# Altium PCB V_№8.PcbDoc
Units mm, origin at the board's own origin, x right, y up, seen from the top; angles counter-clockwise.
Board outline 32.25 x 27.5 mm, 2 copper layers (Top Layer, Bottom Layer); 14 components, 15 nets, 90 pads, 7 vias.
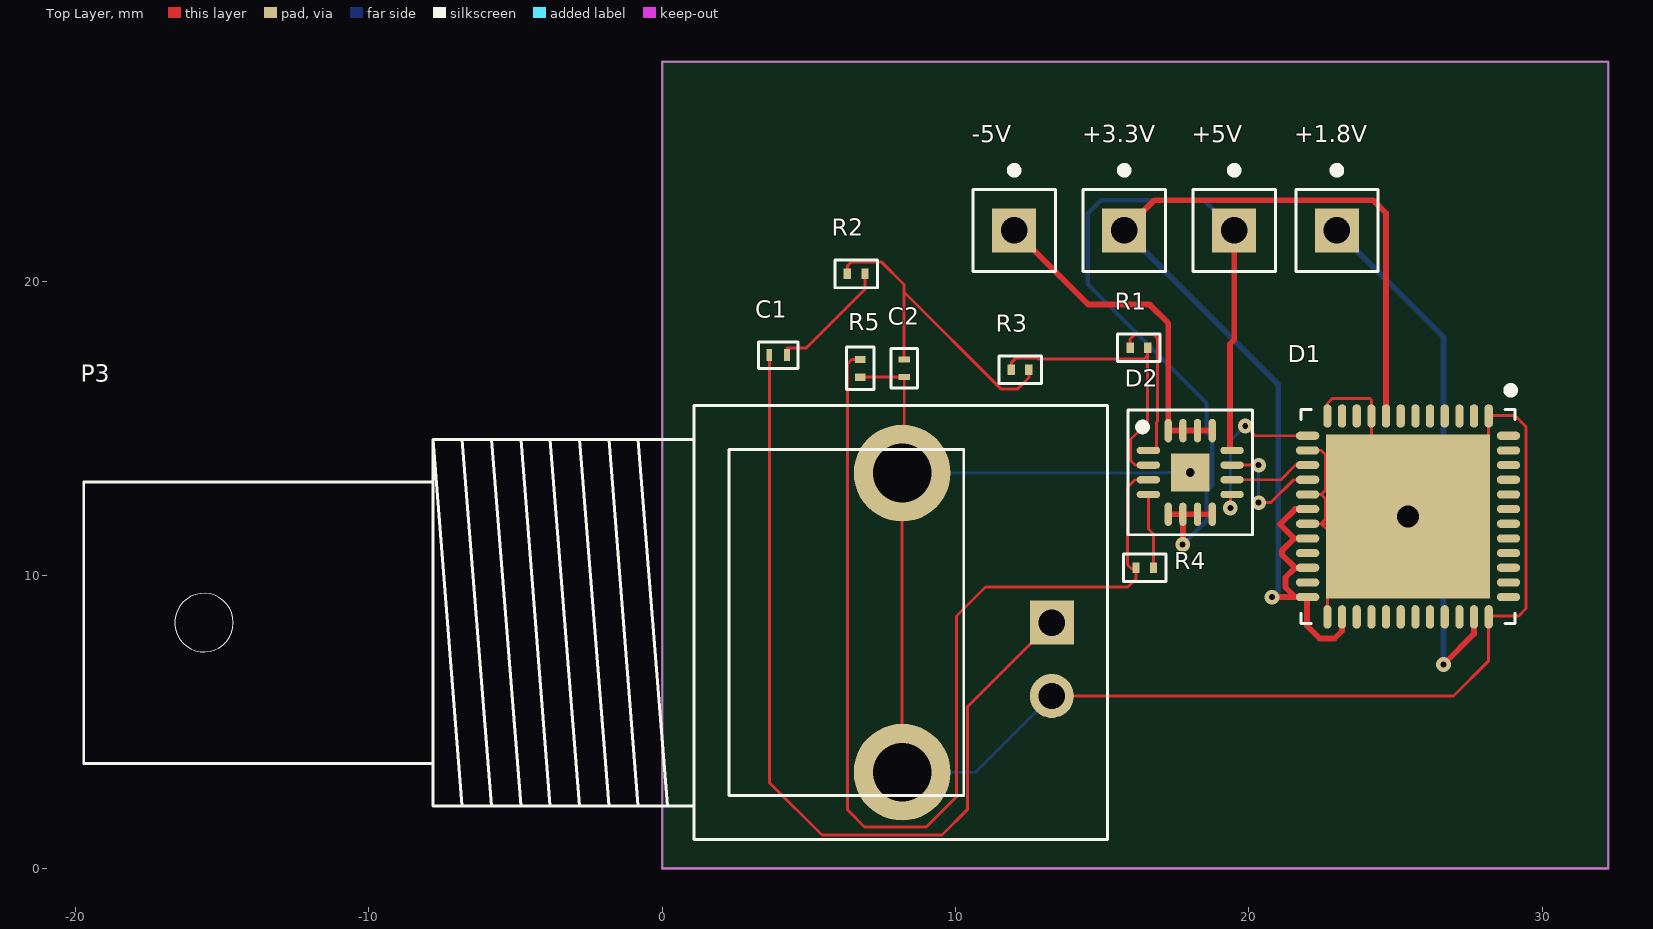
[diagram p0: Top Layer view]
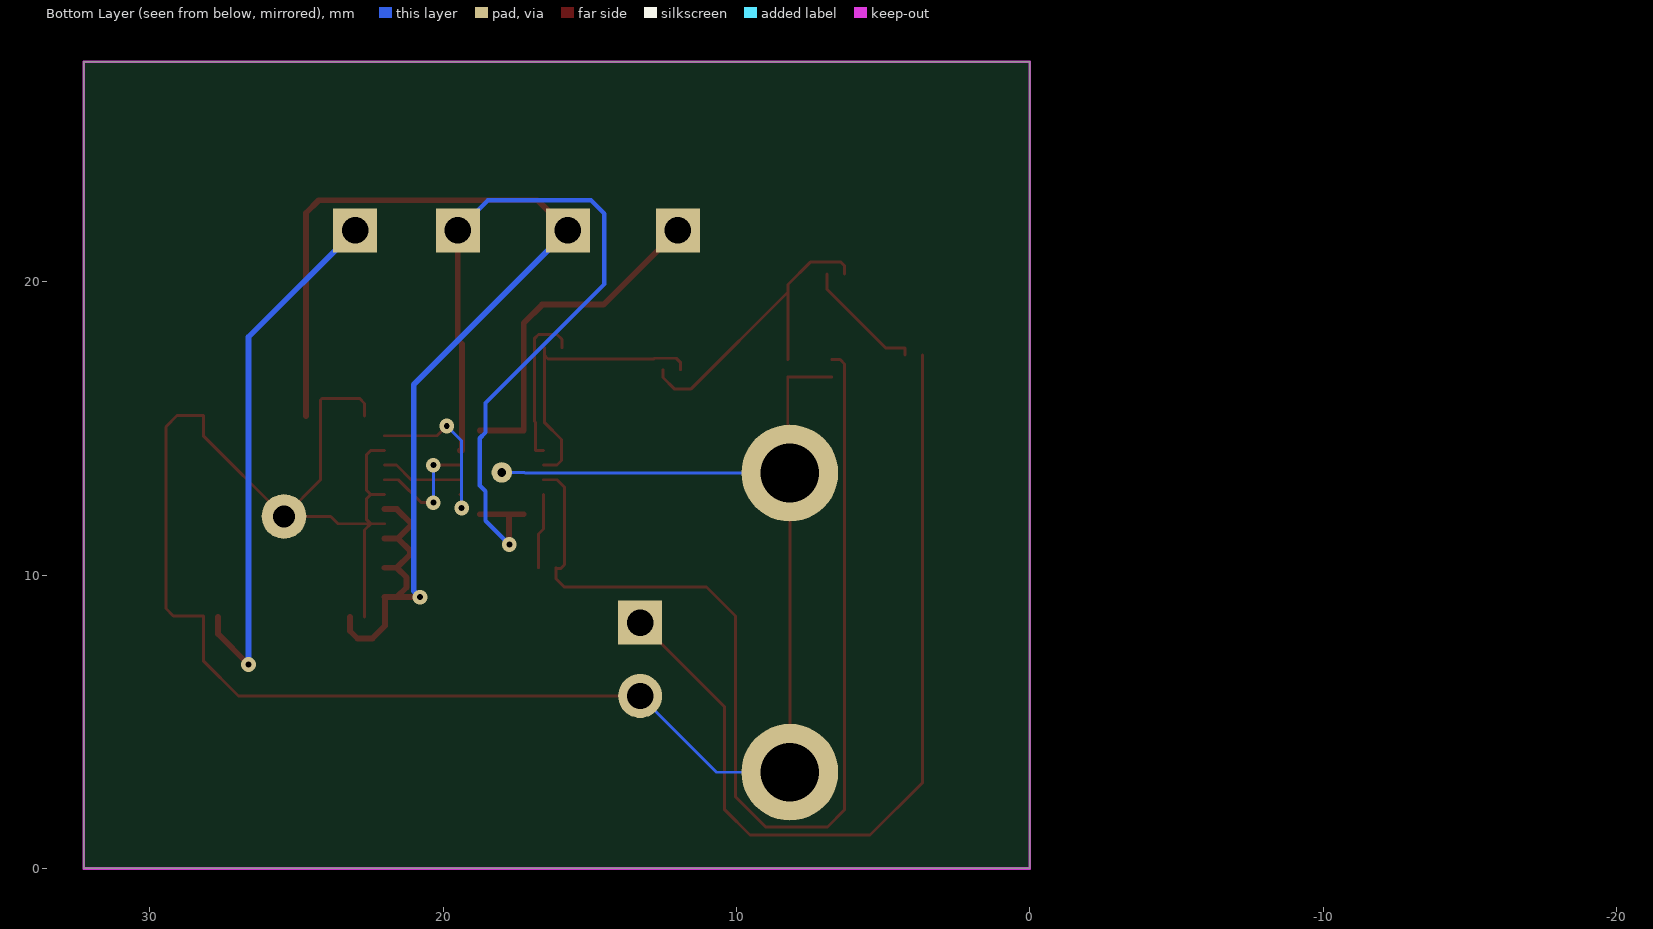
[diagram p1: Bottom Layer view, seen from below]
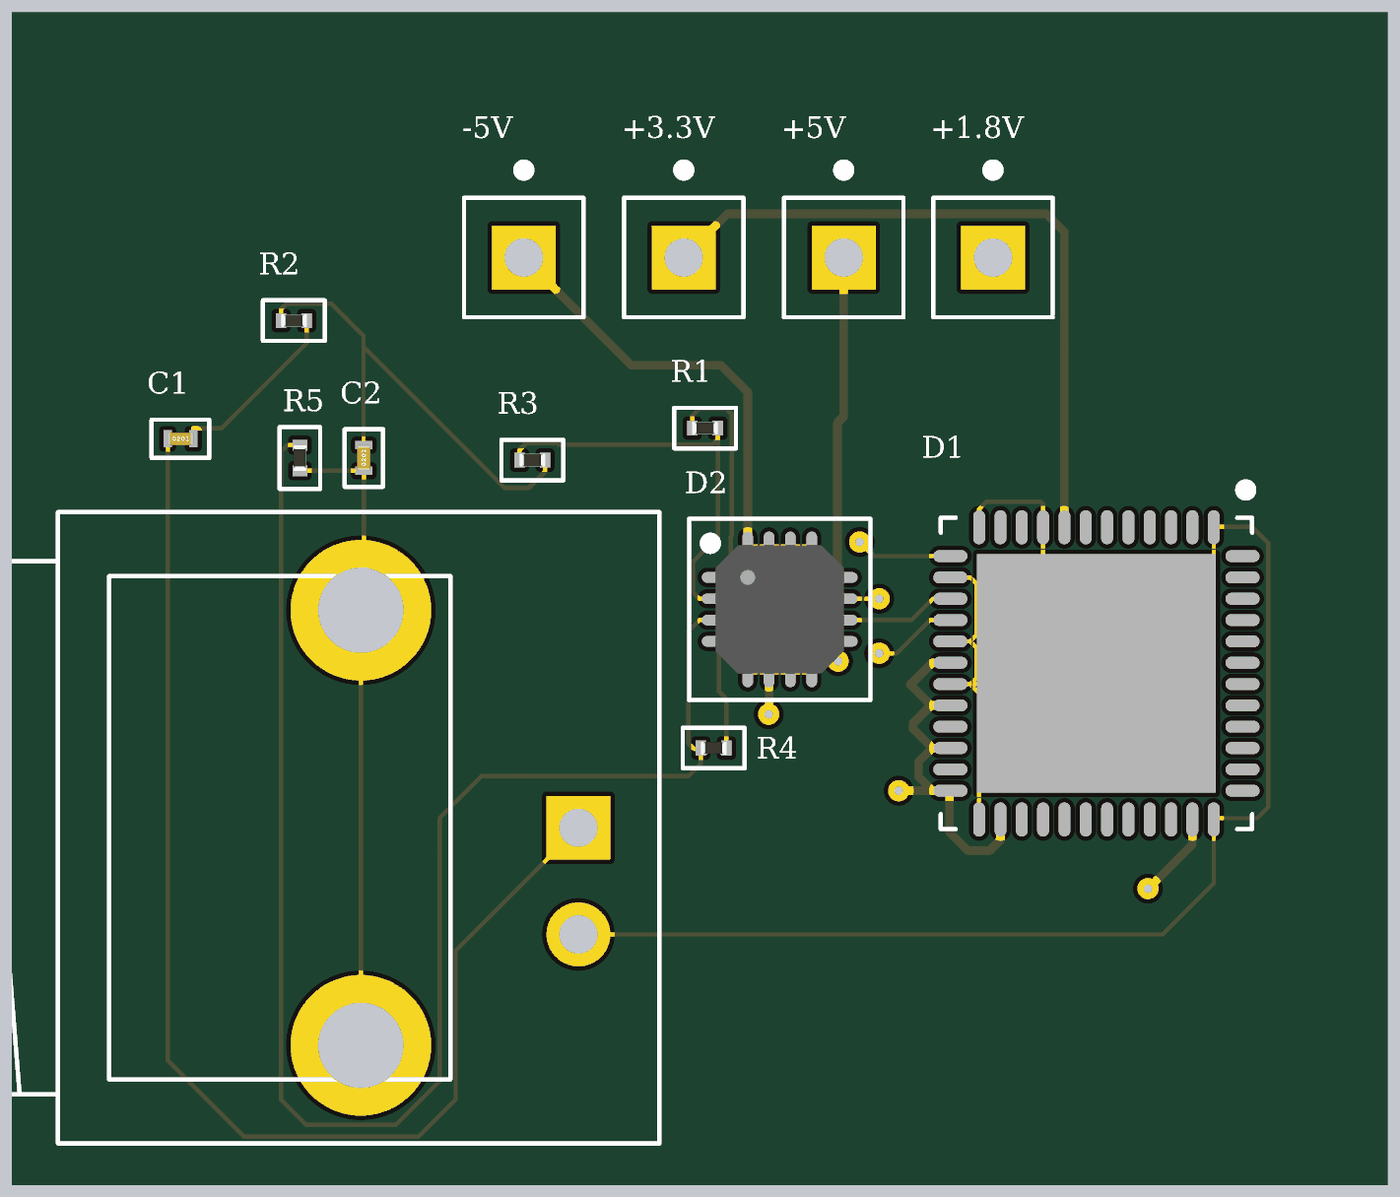
[diagram p2: 3D render of the assembled board from above, using the file's embedded part models]

## Layer stack, top to bottom
Top Solder: solder mask 0.0102, Solder Resist, Dk 3.5
Top Layer: signal copper 0.0356
Dielectric 1: dielectric 0.32, FR-4, Dk 4.8
Bottom Layer: signal copper 0.0356
Bottom Solder: solder mask 0.0102, Solder Resist, Dk 3.5

## Board outline
0,0 32.25,0 32.25,27.5 0,27.5

## Design rules (kind name [scope] priority, off if disabled: settings)
Clearance [All] p1: gap=0.15 ignorepadtopadclearanceinfootprint=FALSE
PolygonConnect [All] p1: connectstyle=Relief reliefconductorwidth=0.254 reliefentries=4 polygonreliefangle="90 Angle" airgapwidth=0.254
RoutingVias [All] p1: holewidth=0.2 width=0.5 viastyle="Through Hole" minholewidth=0.2 minwidth=0.5 maxholewidth=0.2 maxwidth=0.5
SolderMaskExpansion [All] p1: expansion=0.102
Width [All] p1: maxlimit=0.3 minlimit=0.1 preferedwidth=0.1
30 further rules are at their usual default settings.

## Components (designator, comment, footprint, x,y, rotation, side; value= is the part's Value field where it differs from the comment)
+1.8V "Plug" PIN1 23,21.75 r0 top
+3.3V "Plug" PIN1 15.75,21.75 r0 top
+5V "Plug" PIN1 19.5,21.75 r0 top
-5V "Plug" PIN1 12,21.75 r0 top
C1 "4.3п" 0101 3.95,17.5 r0 top
C2 "16п" 0101 8.25,17.05 r90 top
D1 "ADS61B49IRGZT" QFN50P700X700X100_HS-49N 25.425,12 r270 top
D2 "ADA4932-1YCPZ-R2" QFN50P300X300X100_HS-17N 18,13.5 r0 top
P3 "BNC" "BNC_RA CON" 13.28,8.38 r0 top
R1 "499" 0201 16.25,17.75 r0 top
R2 "1.6k" 0201 6.61,20.27 r0 top
R3 "499" 0201 12.2,17 r0 top
R4 "499" 0201 16.45,10.25 r180 top
R5 "499" 0201 6.75,17.05 r270 top

## Footprints (in the part's own frame and the unit in brackets; to place one, negate y for a bottom-side part, rotate by r counter-clockwise, add the part's x,y. Pads: shape width x height; smd on the part's side, far side on the other; paste and mask are expansions set on the pad)
0101 [mm]
  rect 0.2x0.4 smd: 1(-0.3,0) 2(0.3,0)
  silkscreen extent -0.68,-0.45 0.68,0.45, body extent -0.3,-0.15 0.3,0.15, height 0.31
0201 [mm]
  rect 0.25x0.35 smd: 1(-0.3,0) 2(0.3,0)
  silkscreen extent -0.73,-0.47 0.73,0.48, body extent -0.3,-0.15 0.3,0.15, height 0.23
"BNC_RA CON" [mm] "Connector; BNC Elbow"
  rect 1.5x1.5 hole 0.9: 1(0,0)
  round 3.3 hole 2: 2(-5.1,-5.1) 2(-5.1,5.1)
  round 1.5 hole 0.9: 2(0,-2.5)
  silkscreen extent -33,-7.4 1.9,7.4
PIN1 [mm] "Connector; Plug"
  rect 1.5x1.5 hole 0.9: 1(0,0)
  silkscreen extent -1.4,-1.4 1.4,2.17
QFN50P300X300X100_HS-17N [mm] "QFN, 16-Leads, Body 3,00x3,00mm, Pitch 0,50mm, Thermal Pad 1,30x1,30mm, IPC Medium Density"
  rect 1.3x1.3 smd: 0(0,0)
  round 0.7 hole 0.3: 0(0,0)
  oval 0.8x0.25 smd: 1(-1.425,0.75) 2(-1.425,0.25) 3(-1.425,-0.25) 4(-1.425,-0.75) 9(1.425,-0.75) 10(1.425,-0.25) 11(1.425,0.25) 12(1.425,0.75)
  oval 0.25x0.8 smd: 5(-0.75,-1.425) 6(-0.25,-1.425) 7(0.25,-1.425) 8(0.75,-1.425) 13(0.75,1.425) 14(0.25,1.425) 15(-0.25,1.425) 16(-0.75,1.425)
  silkscreen extent -2.12,-2.12 2.12,2.13, body extent -1.51,-1.51 1.51,1.51, height 1.01
QFN50P700X700X100_HS-49N [mm] "QFN, 48-Leads, Body 7,00x7,00mm, Pitch 0,50mm, Thermal Pad 5,60x5,60mm, IPC Medium Density"
  rect 5.6x5.6 smd: 0(0,0)
  round 1.524 hole 0.762: 0(0,0)
  oval 0.8x0.28 smd: 1(-3.425,2.75) 2(-3.425,2.25) 3(-3.425,1.75) 4(-3.425,1.25) 5(-3.425,0.75) 6(-3.425,0.25) 7(-3.425,-0.25) 8(-3.425,-0.75) 9(-3.425,-1.25) 10(-3.425,-1.75) 11(-3.425,-2.25) 12(-3.425,-2.75) 25(3.425,-2.75) 26(3.425,-2.25) 27(3.425,-1.75) 28(3.425,-1.25) 29(3.425,-0.75) 30(3.425,-0.25) 31(3.425,0.25) 32(3.425,0.75) 33(3.425,1.25) 34(3.425,1.75) 35(3.425,2.25) 36(3.425,2.75)
  oval 0.28x0.8 smd: 13(-2.75,-3.425) 14(-2.25,-3.425) 15(-1.75,-3.425) 16(-1.25,-3.425) 17(-0.75,-3.425) 18(-0.25,-3.425) 19(0.25,-3.425) 20(0.75,-3.425) 21(1.25,-3.425) 22(1.75,-3.425) 23(2.25,-3.425) 24(2.75,-3.425) 37(2.75,3.425) 38(2.25,3.425) 39(1.75,3.425) 40(1.25,3.425) 41(0.75,3.425) 42(0.25,3.425) 43(-0.25,3.425) 44(-0.75,3.425) 45(-1.25,3.425) 46(-1.75,3.425) 47(-2.25,3.425) 48(-2.75,3.425)
  silkscreen extent -4.42,-3.65 3.65,3.65, body extent -3.5,-3.5 3.5,3.5, height 1

## Part data
C1 C2: library part Capacitor
D1: library part ADS61B49, Manufacturer="Texas Instruments", Package="48-VQFN (7x7)", HelpURL=https://www.digikey.com/product-detail/en/texas-instruments/ADS61B49IRGZT/296-24045-2-ND/1990125, PartNumber=ADS61B49IRGZT
D2: library part ADA4932, Manufacturer="Analog Devices Inc.", Package="6-VFQFN Exposed Pad, CSP", HelpURL=https://www.digikey.com/product-detail/en/analog-devices-inc/ADA4932-1YCPZ-R2/ADA4932-1YCPZ-R2TR-ND/1981972, PartNumber=ADA4932-1YCPZ-R2
P3: "BNC Elbow Connector", LatestRevisionDate=17-Jul-2002, LatestRevisionNote="Re-released for DXP Platform.", Publisher="Altium Limited"
R1 R2 R3 R4 R5: library part Resistor
+1.8V +3.3V +5V -5V: LatestRevisionDate=17-Jul-2002, LatestRevisionNote="Re-released for DXP Platform.", Publisher="Altium Limited"

## Via types
v1: diameter 0.5, hole 0.2, Top Layer to Bottom Layer, 7 vias

## Nets (pads, with @x,y where several pads share a name; then routed paths per layer and width w, separated by ;. In a path a pad name is that pad's centre, name@x,y a point inside that pad or via, vN(x,y) a via of type N, cw(c..) or ccw(c..) an arc to the next point about the centre after c; other vN are vias at no path point)
GND: C2.1 D1.0 D1.1 D1.9 D1.12 D1.14 D1.17 D1.19 D1.25 D1.36 D2.0 P3.2 R5.2 | length 78.5
  Top Layer w0.1: R5.2 C2.1 8.25,13.55 8.18,13.48 P3.2@8.18,3.28 ; P3.2@13.28,5.88 26.975,5.88 28.175,7.08 D1.36 28.175,8.604 29.197,8.604 29.451,8.858 29.451,15.056 29.07,15.437 28.175,15.437 D1.1 28.175,14.75 D1.0@25.425,12 ; D1.19 22.466,11.75 ; D1.17 22.466,12.75 ; D1.14 22.466,14.25 22.618,14.098 22.618,12.902 22.466,12.75 ; D1.25 22.675,11.541 22.466,11.75 ; D1.12 22.675,15.855 22.847,16.027 24.118,16.027 24.175,15.97 D1.9 24.175,13.25 D1.0@25.425,12 ; 22.466,11.75 23.584,11.75 23.834,12 D1.0@25.425,12 ; 22.466,11.75 22.618,11.902 22.618,12.598 22.466,12.75
  Bottom Layer w0.1: P3.2@8.18,3.28 10.68,3.28 P3.2@13.28,5.88 ; P3.2@8.18,13.48 17.2,13.48 17.22,13.5 D2.0@18,13.5
Net+1.8V_1: +1.8V.1 D1.35 | length 18.4
  Top Layer w0.2: v1(26.632,6.953) 27.675,7.996 D1.35
  Bottom Layer w0.2: +1.8V.1 26.632,18.118 v1(26.632,6.953)
Net+3.3V_1: +3.3V.1 D1.8 D1.18 D1.20 D1.22 D1.24 D1.26 | length 40.7
  Top Layer w0.2: +3.3V.1 16.777,22.777 24.244,22.777 24.675,22.346 D1.8 ; v1(20.79,9.25) 21.577,9.25 ; D1.24 D1.24@21.983,9.25 ; D1.22 21.577,10.25 ; D1.20 21.547,11.25 ; D1.18 21.577,12.25 21.062,11.735 21.547,11.25 ; D1.26 23.175,8.096 22.921,7.842 22.413,7.842 21.983,8.272 D1.24@21.983,9.25 ; 21.547,11.25 21.125,10.828 21.125,10.702 21.577,10.25 ; 21.577,9.25 21.25,9.577 21.25,9.923 21.577,10.25 ; 21.577,9.25 D1.24@21.983,9.25
  Bottom Layer w0.2: +3.3V.1 21,16.5 21,9.46 v1(20.79,9.25)
Net+5V_1: +5V.1 D2.5 D2.6 D2.7 D2.8 D2.12 | length 29.2
  Top Layer w0.2: D2.5 D2.6 ; v1(17.742,11.042) 17.75,11.051 D2.6 ; D2.8 D2.7 D2.6 ; D2.12 19.355,14.25 19.355,17.881 19.5,18.026 +5V.1
  Bottom Layer w0.15: v1(17.742,11.042) 18.554,11.855 18.554,12.859 18.75,13.054 18.75,14.67 18.554,14.865 18.554,15.868 14.5,19.923 14.5,22.318 14.959,22.777 18.473,22.777 +5V.1
Net-5V_1: -5V.1 D2.13 D2.14 D2.15 D2.16 | length 11.7
  Top Layer w0.2: -5V.1 14.529,19.221 16.624,19.221 17.25,18.595 D2.16 D2.15 D2.14 D2.13
NetC1_1: C1.1 P3.1 | length 30
  Top Layer w0.1: C1.1 3.65,2.934 5.448,1.136 9.537,1.136 10.401,2 10.401,5.501 P3.1
NetC1_2: C1.2 R2.2 | length 4.3
  Top Layer w0.1: C1.2 4.25,17.748 4.915,17.748 6.91,19.743 R2.2
NetC2_2: C2.2 R2.1 R3.2 | length 11.2
  Top Layer w0.1: R2.1 6.31,20.542 6.437,20.669 7.48,20.669 8.242,19.907 8.242,19.653 ; C2.2 8.242,17.35 8.242,19.653 ; R3.2 12.5,16.732 12.119,16.351 11.544,16.351 8.242,19.653
NetD1_13: D1.13 D2.9 | length 5.8
  Top Layer w0.1: v1(19.367,12.287) 19.367,12.75 D2.9 ; v1(19.875,15.081) 20.206,14.75 D1.13
  Bottom Layer w0.1: v1(19.367,12.287) 19.367,14.573 v1(19.875,15.081)
NetD1_15: D1.15 D2.10 | length 2.8
  Top Layer w0.1: D2.10 21.09,13.25 21.59,13.75 D1.15
NetD1_16: D1.16 D2.11 | length 4.2
  Top Layer w0.1: D2.11 v1(20.332,13.75) ; v1(20.332,12.471) 20.748,12.471 21.526,13.25 D1.16
  Bottom Layer w0.1: v1(20.332,12.471) v1(20.332,13.75)
NetD2_1: D2.1 R1.1 | length 5.5
  Top Layer w0.1: R1.1 15.95,18.039 16.116,18.205 16.751,18.205 16.878,18.078 16.878,15.233 16.853,15.208 16.853,14.25 D2.1
NetD2_2: D2.2 R1.2 R3.1 | length 9.8
  Top Layer w0.1: R3.1 11.9,17.24 12.052,17.392 12.789,17.392 12.814,17.367 16.423,17.367 16.55,17.494 ; R1.2 16.55,17.494 ; D2.2 16.116,13.75 15.964,13.902 15.964,14.624 16.55,15.21 16.55,17.494
NetD2_3: D2.3 R4.2 R5.1 | length 37.1
  Top Layer w0.1: R5.1 6.464,17.35 6.312,17.198 6.312,2 6.896,1.416 9.004,1.416 10.03,2.442 10.03,8.604 11.021,9.595 15.871,9.595 16.15,9.874 R4.2@16.15,10.23 ; R4.2 R4.2@16.15,10.23 ; D2.3 16.116,13.25 15.862,12.996 15.862,10.357 15.989,10.23 R4.2@16.15,10.23
NetD2_4: D2.4 R4.1 | length 2.6
  Top Layer w0.1: D2.4 16.575,11.573 16.75,11.398 R4.1
pads on no net: D1.2 D1.3 D1.4 D1.5 D1.6 D1.7 D1.10 D1.11 D1.21 D1.23 D1.27 D1.28 D1.29 D1.30 D1.31 D1.32 D1.33 D1.34 D1.37 D1.38 D1.39 D1.40 D1.41 D1.42 D1.43 D1.44 D1.45 D1.46 D1.47 D1.48

## Keep-outs
Keep-Out Layer:
  the board outline again, w0.1